# EAGLE board EndStop (EAGLE 7.2.0)
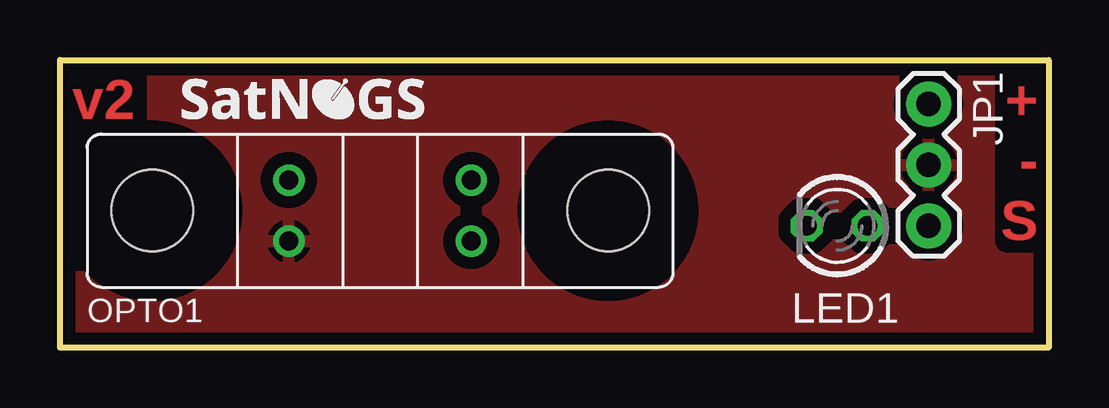
[diagram p0: board, top side]
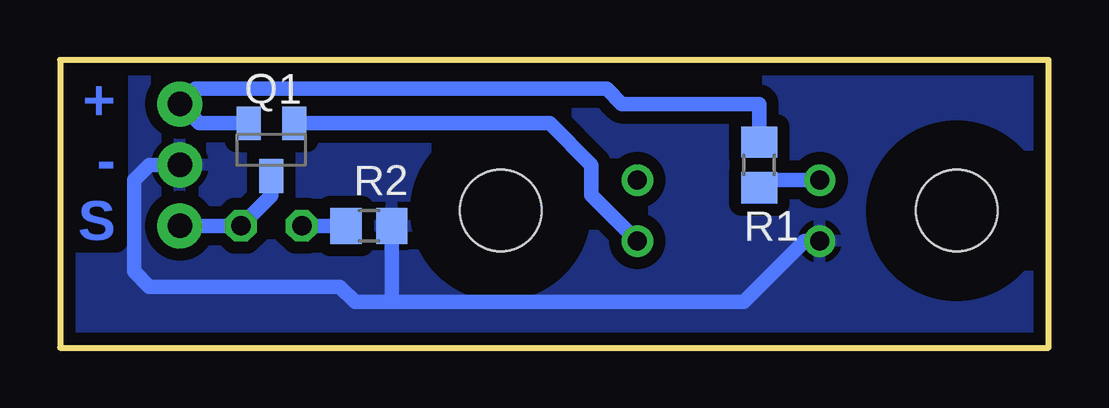
[diagram p1: board, bottom side, seen from below]

Size 41.19 x 12 mm. Coordinates in mm from the lower left corner, seen from the top.
Outline: 0,0 0,12 41.19,12 41.19,0 0,0
Copper layers (1*16): Top 0.035mm / dielectric 1.5mm / Bottom 0.035mm
Design rules "SeeedStudio_2layer_DRU_no_angle_20140221": minimum track width 6mil, minimum drill 12mil, track to track 6mil, track to pad 6mil, pad to pad 6mil, via to via 6mil, smd to smd 0mil, copper to edge 10mil, drill to drill 10mil, minimum pad ring 10mil, minimum via ring 6mil, stop-mask expansion 2mil, vias tented up to drill 100mil, thermal gap 10mil
Net classes: 0 default: width 0.508 mm, drill 0.813 mm, clearance 0.254 mm

## Footprints (pad centres in the part's own frame; a part is rotated, then mirrored left to right if it is on the bottom)
1X03 = drill 1.016 pad 1.88: 1 0,0; 2 2.54,0; 3 5.08,0
LED3MM = drill 0.813 octagon: A -1.27,0; K 1.27,0
TCST2013 = drill 0.8: LED_A -3.8,1.27; LED_K -3.8,-1.27; NPN_C 3.8,-1.27; NPN_E 3.8,1.27 | hole 3.4: -9.5,0; 9.5,0
SOT23-BEC = smd 1 x 1.4: B -0.95,-1.1; C 0,1.1; E 0.95,-1.1
R0805 = smd 1.3 x 1.5: 1 -0.95,0; 2 0.95,0

## Placement (x,y rotation side)
JP1  [1X03]  36.2,10.16 270 top
LED1  [LED3MM]  32.38,5.08 180 top
LOGO1  SATNOGS_LOGOSILK_XS  [LOGO_SILK_XS]  5.08,9.53 0 top
OPTO1  TCST2103  [TCST2013]  13.34,5.71 0 top
Q1  BC857ALT1SMD  [SOT23-BEC]  32.38,8.26 180 bottom
R1  180  [R0805]  12.06,7.62 90 bottom
R2  180  [R0805]  28.32,5.08 0 bottom

## Library data of the parts
JP1 = SparkFun-Connectors
LED1 = led
LOGO1 OPTO1 = satnogs
Q1 = transistor-pnp
R1 R2 = rcl

## Nets
GND: JP1.2 OPTO1.LED_K R2.2
N$2: OPTO1.LED_A R1.1
N$3: LED1.K R2.1
N$4: OPTO1.NPN_C Q1.B
SIGNAL: JP1.3 LED1.A Q1.C
VCC: JP1.1 Q1.E R1.2

## Tracks (layer width: path | path; a pad name or v marks a point on that pad's centre or on a via)
GND
  Bottom 0.61: JP1.2 37.47,7.62 38.1,6.99 38.1,3.17 37.47,2.54 29.52,2.54 28.89,1.91 27.3,1.91 | OPTO1.LED_K 10.16,4.45 12.7,1.91 27.3,1.91 | R2.2 27.37,1.97 27.3,1.91
  pour Bottom (isolate 0.508): -1.27,0 41.27,0 41.27,12.06 -1.27,12.06
  pour Top (isolate 0.508, rank 2): 0,0 41.27,0 41.27,12.06 0,12.06
N$2
  Bottom 0.61: OPTO1.LED_A 12.38,6.99 R1.1
N$3
  Bottom 0.61: R2.1 LED1.K
N$4
  Bottom 0.61: Q1.B 20.79,9.36 19.05,7.62 19.05,6.36 OPTO1.NPN_C
SIGNAL
  Bottom 0.61: Q1.C 32.38,6.35 LED1.A JP1.3
VCC
  Bottom 0.61: R1.2 12.06,10.16 17.78,10.16 18.41,10.79 35.56,10.79 JP1.1 35.39,9.36 Q1.E

## Text on the board
Top: + / - / S | v2
Bottom: + / - / S
tValues: v2